# EAGLE board 24V AC SSR Board_bk (EAGLE 7.3.0)
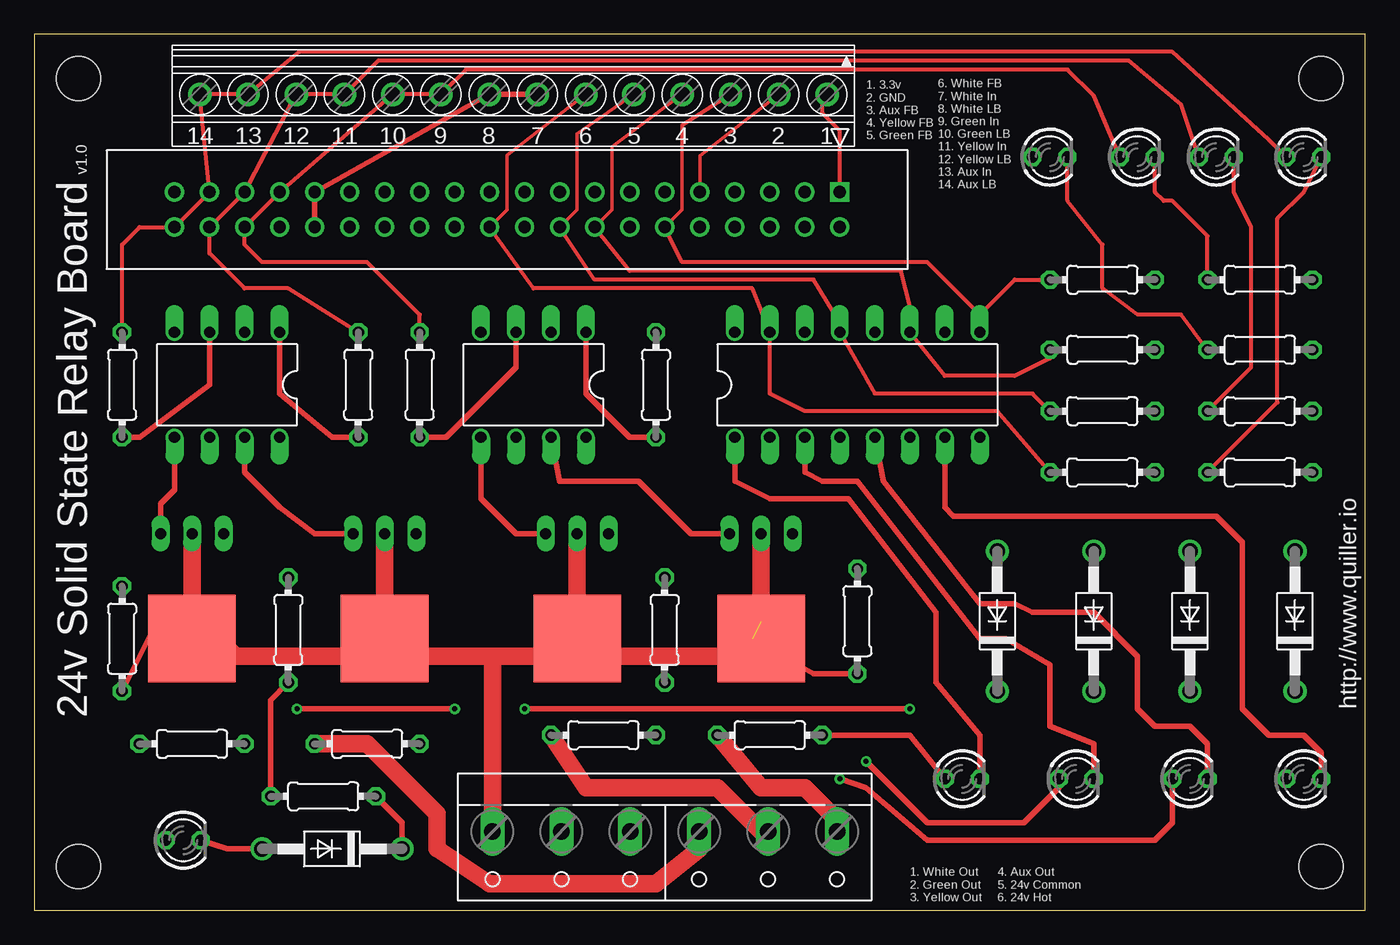
[diagram p0: board, top side]
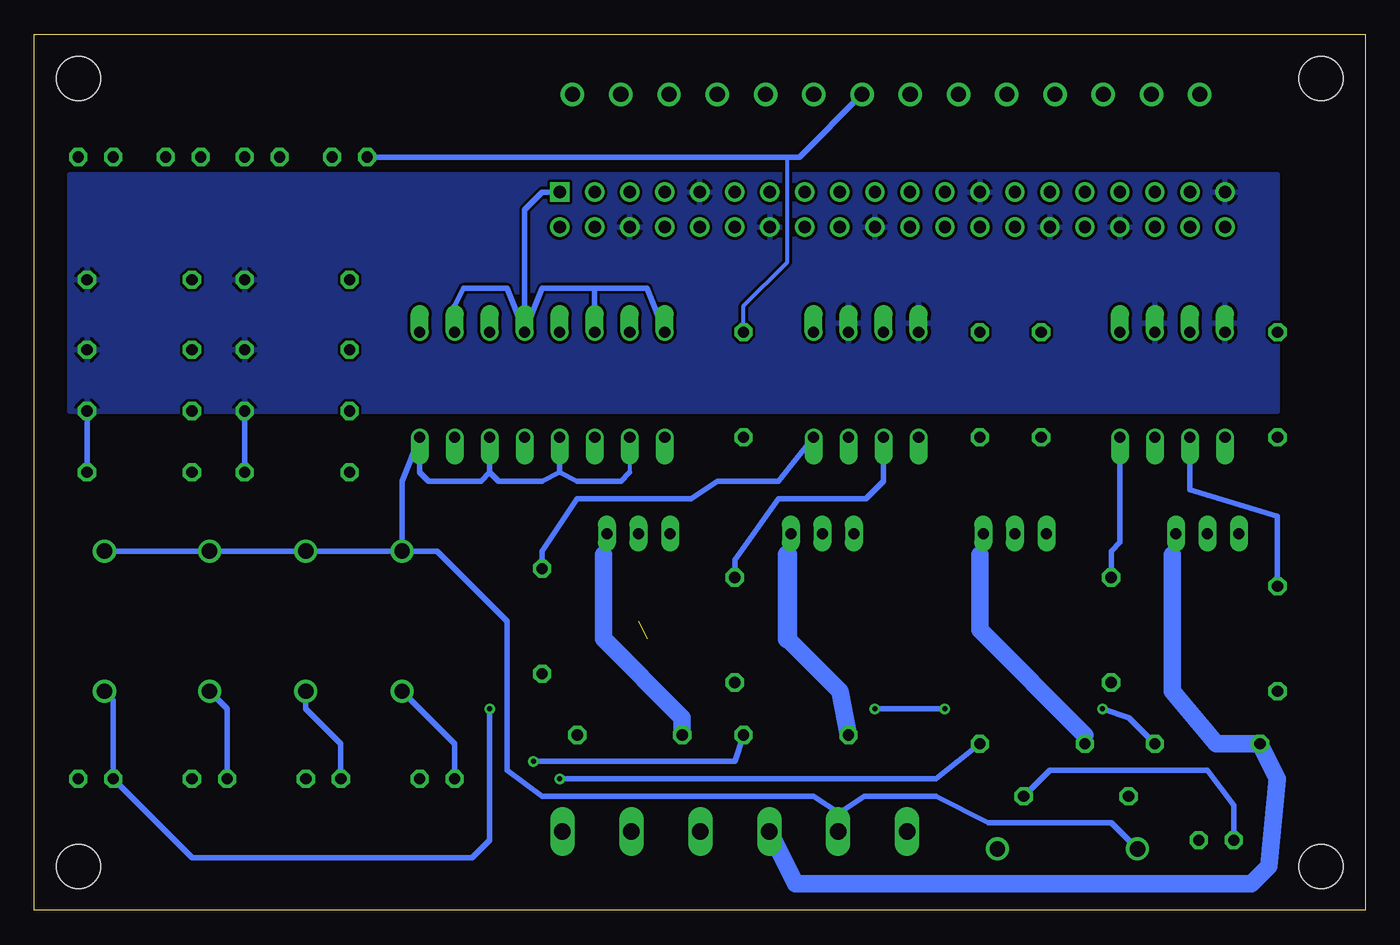
[diagram p1: board, bottom side, seen from below]

Size 96.52 x 63.5 mm. Coordinates in mm from the lower left corner, seen from the top.
Outline: 0,0 96.52,0 96.52,63.5 0,63.5 0,0
Copper layers (1*16): Top 0.035mm / dielectric 1.5mm / Bottom 0.035mm
Design rules "default": minimum track width 10mil, minimum drill 24mil, track to track 8mil, track to pad 8mil, pad to pad 8mil, via to via 8mil, smd to smd 8mil, copper to edge 40mil, drill to drill 8mil, minimum pad ring 10mil, minimum via ring 8mil, stop-mask expansion 4mil, vias tented up to drill 0mil, thermal gap 10mil
Holes 3.2 mm at 3.17,60.33 93.34,60.33 93.34,3.17 3.17,3.17

## Footprints (pad centres in the part's own frame; a part is rotated, then mirrored left to right if it is on the bottom)
DO41-10 = drill 1.118: A 5.08,0; C -5.08,0
3M_2540-6002UB = drill 0.889 square: 1 0,2.54 | drill 0.889: 2 0,0; 3 -2.54,2.54; 4 -2.54,0; 5 -5.08,2.54; 6 -5.08,0; 7 -7.62,2.54; 8 -7.62,0; 9 -10.16,2.54; 10 -10.16,0; 11 -12.7,2.54; 12 -12.7,0; 13 -15.24,2.54; 14 -15.24,0; 15 -17.78,2.54; 16 -17.78,0; 17 -20.32,2.54; 18 -20.32,0; 19 -22.86,2.54; 20 -22.86,0; 21 -25.4,2.54; 22 -25.4,0; 23 -27.94,2.54; 24 -27.94,0; 25 -30.48,2.54; 26 -30.48,0; 27 -33.02,2.54; 28 -33.02,0; 29 -35.56,2.54; 30 -35.56,0; 31 -38.1,2.54; 32 -38.1,0; 33 -40.64,2.54; 34 -40.64,0; 35 -43.18,2.54; 36 -43.18,0; 37 -45.72,2.54; 38 -45.72,0; 39 -48.26,2.54; 40 -48.26,0
LED3MM = drill 0.813 octagon: A -1.27,0; K 1.27,0
DIL16 = drill 0.813 offset: 1 -8.89,-3.81; 2 -6.35,-3.81; 3 -3.81,-3.81; 4 -1.27,-3.81; 5 1.27,-3.81; 6 3.81,-3.81; 7 6.35,-3.81; 8 8.89,-3.81; 9 8.89,3.81; 10 6.35,3.81; 11 3.81,3.81; 12 1.27,3.81; 13 -1.27,3.81; 14 -3.81,3.81; 15 -6.35,3.81; 16 -8.89,3.81
0204/7 = drill 0.813 octagon: 1 -3.81,0; 2 3.81,0
W237-6 = drill 1.194 long: 1 -12.5,-1.27; 2 -7.5,-1.27; 3 -2.5,-1.27; 4 2.5,-1.27; 5 7.5,-1.27; 6 12.5,-1.27
SOT-82 = drill 0.8 long: P$1 -2.29,0; P$2 0,0; P$3 2.29,0 | smd 6.35 x 6.35: P$4 0,7.62
DIL08 = drill 0.813 offset: 1 -3.81,-3.81; 2 -1.27,-3.81; 3 1.27,-3.81; 4 3.81,-3.81; 5 3.81,3.81; 6 1.27,3.81; 7 -1.27,3.81; 8 -3.81,3.81
1751293 = drill 1.1 pad 1.7: 1 -10.5,-0.1; 2 -7,-0.1; 3 -3.5,-0.1; 4 0,-0.1; 5 3.5,-0.1; 6 7,-0.1; 7 10.5,-0.1; 8 14,-0.1; 9 17.5,-0.1; 10 21,-0.1; 11 24.5,-0.1; 12 28,-0.1; 13 31.5,-0.1; 14 35,-0.1

## Placement (x,y rotation side)
D1  1N4004  [DO41-10]  21.59,4.45 180 top
D2  1N4001  [DO41-10]  69.85,20.95 90 top
D3  1N4001  [DO41-10]  76.83,20.95 90 top
D4  1N4001  [DO41-10]  83.82,20.95 90 top
D5  1N4001  [DO41-10]  91.44,20.95 90 top
IN  30340-6002HB  [3M_2540-6002UB]  58.42,49.53 0 top
LED4  Red  [LED3MM]  10.79,5.08 0 top
LED_IN_A  Blue  [LED3MM]  92.08,54.61 0 top
LED_IN_G  Green  [LED3MM]  80.01,54.61 0 top
LED_IN_W  White  [LED3MM]  73.66,54.61 0 top
LED_IN_Y  Yellow  [LED3MM]  85.72,54.61 0 top
LED_OUT_A  Blue  [LED3MM]  92.08,9.53 0 top
LED_OUT_G  Green  [LED3MM]  75.56,9.53 0 top
LED_OUT_W  White  [LED3MM]  67.31,9.53 0 top
LED_OUT_Y  Yellow  [LED3MM]  83.82,9.53 0 top
OPTO-ISO  LTV-845  [DIL16]  59.69,38.1 0 top
R1  100  [0204/7]  59.69,20.95 270 top
R2  330  [0204/7]  45.09,38.1 270 top
R3  100  [0204/7]  45.72,20.32 270 top
R4  330  [0204/7]  27.94,38.1 270 top
R5  100  [0204/7]  18.41,20.32 270 top
R6  330  [0204/7]  23.5,38.1 270 top
R7  100  [0204/7]  88.9,40.64 0 top
R8  100  [0204/7]  88.9,45.72 0 top
R9  100  [0204/7]  88.9,36.2 0 top
R10  2.2K  [0204/7]  20.95,8.26 0 top
R11  2.2K  [0204/7]  53.34,12.7 0 top
R12  2.2K  [0204/7]  41.27,12.7 0 top
R13  2.2K  [0204/7]  24.13,12.06 0 top
R14  330  [0204/7]  6.35,38.1 270 top
R15  100  [0204/7]  88.9,31.75 0 top
R16  100  [0204/7]  6.35,19.68 270 top
R17  2.2K  [0204/7]  11.43,12.06 0 top
R18  4.7K  [0204/7]  77.47,31.75 0 top
R19  4.7K  [0204/7]  77.47,36.2 0 top
R20  4.7K  [0204/7]  77.47,40.64 0 top
R21  4.7K  [0204/7]  77.47,45.72 0 top
TERM  [W237-6]  45.72,4.45 180 top
U$1  BT134  [SOT-82]  52.7,27.3 180 top
U$2  BT134  [SOT-82]  39.37,27.3 180 top
U$3  BT134  [SOT-82]  25.4,27.3 180 top
U$4  BT134  [SOT-82]  11.43,27.3 180 top
U$5  TLP525G−4  [DIL08]  36.2,38.1 180 top
U$6  TLP525G−4  [DIL08]  13.97,38.1 180 top
X1  1751293  [1751293]  46.99,59.05 180 top

## Library data of the parts
D1-D5 = diode
IN = 3M_By_element14_Batch_1; MPN: 2540-6002UB; OC_FARNELL: 1368965; OC_NEWARK: 46F4732; PACKAGE: Four-Wall Header, 40way; SUPPLIER: 3M
LED4 LED_IN_A LED_IN_G LED_IN_W LED_IN_Y LED_OUT_A LED_OUT_G LED_OUT_W LED_OUT_Y = led
OPTO-ISO U$5 U$6 = myhvac
R1-R21 = rcl
TERM = con-wago-500; OC_FARNELL: unknown; OC_NEWARK: unknown
U$1-U$4 = nich
X1 = myhvac; OC_FARNELL: unknown; OC_NEWARK: unknown

## Nets
3.3V_SOURCE: IN.1 OPTO-ISO.10 OPTO-ISO.12 OPTO-ISO.14 OPTO-ISO.16 X1.1
+24V: R1.2 R3.2 R5.2 R10.1 R16.2 TERM.6 U$1.P$2 U$2.P$2 U$3.P$2 U$4.P$2
AUX_FEEDBACK: IN.12 OPTO-ISO.9 R21.1 X1.3
AUX_IN: IN.37 IN.40 LED_IN_A.A R14.1 X1.13 X1.14
AUX_OUT: R17.1 TERM.4 U$4.P$1
GND: IN.6 IN.9 IN.14 IN.20 IN.25 IN.30 IN.34 IN.39 R7.2 R8.2 R9.2 R15.2 R18.2 R19.2 R20.2 R21.2 U$5.2 U$5.4 U$6.2 U$6.4 X1.2
GREEN_FEEDBACK: IN.18 OPTO-ISO.13 R19.1 X1.5
GREEN_IN: IN.33 IN.36 LED_IN_G.A R4.1 X1.9 X1.10
GREEN_OUT: R12.1 TERM.2 U$2.P$1
N$1: U$1.P$3 U$5.7
N$2: R2.2 U$5.1
N$3: U$4.P$3 U$6.5
N$4: R1.1 U$5.8
N$5: U$3.P$3 U$6.7
N$6: R4.2 U$5.3
N$7: U$2.P$3 U$5.5
N$8: R3.1 U$5.6
N$9: LED_OUT_W.K OPTO-ISO.1
N$10: R6.2 U$6.1
N$11: LED_OUT_G.K OPTO-ISO.3
N$12: R5.1 U$6.8
N$13: LED_OUT_Y.K OPTO-ISO.5
N$14: LED_OUT_A.K OPTO-ISO.7
N$17: LED_IN_W.K R7.1
N$18: LED_IN_G.K R8.1
N$20: LED_IN_Y.K R9.1
N$21: D2.C LED_OUT_W.A R11.2
N$22: D3.C LED_OUT_G.A R12.2
N$23: D4.C LED_OUT_Y.A R13.2
N$24: D1.C LED4.A R10.2
N$27: R14.2 U$6.3
N$28: LED_IN_A.K R15.1
N$29: R16.1 U$6.6
N$30: D5.C LED_OUT_A.A R17.2
V-: D1.A D2.A D3.A D4.A D5.A LED4.K OPTO-ISO.2 OPTO-ISO.4 OPTO-ISO.6 OPTO-ISO.8 TERM.5
WHITE_FEEDBACK: IN.22 OPTO-ISO.15 R18.1 X1.6
WHITE_IN: IN.31 IN.32 LED_IN_W.A R2.1 X1.7 X1.8
WHITE_OUT: R11.1 TERM.1 U$1.P$1
YELLOW_FEEDBACK: IN.16 OPTO-ISO.11 R20.1 X1.4
YELLOW_IN: IN.35 IN.38 LED_IN_Y.A R6.1 X1.11 X1.12
YELLOW_OUT: R13.1 TERM.3 U$3.P$1

## Tracks (layer width: path | path; a pad name or v marks a point on that pad's centre or on a via)
3.3V_SOURCE
  Top 0.305: IN.1 58.42,56.52 57.15,57.78 57.15,59.49 X1.1
  Bottom 0.406: OPTO-ISO.16 52.07,45.09 55.88,45.09 | 55.88,45.09 59.69,45.09 OPTO-ISO.12 | OPTO-ISO.14 55.88,45.09 | OPTO-ISO.12 62.23,45.09 65.41,45.09 66.04,43.81 OPTO-ISO.10 | IN.1 59.69,52.07 60.96,50.8 OPTO-ISO.12
+24V  (1 unrouted)
  Top 0.406: R16.2 8.89,20.95 12.38,20.64 | 19.05,18.41 18.41,17.78 R5.2 17.14,15.24 R10.1 | R3.2 45.72,18.41 | R1.2 56.52,17.14 52.07,19.68
  Top 1.27: TERM.6 33.22,18.41 | 33.22,18.41 25.4,18.41 | 25.4,18.41 19.05,18.41 14.61,18.41 12.38,20.64 11.43,21.59 U$4.P$2 | U$3.P$2 25.4,18.41 | U$1.P$2 52.7,20.95 50.16,18.41 45.72,18.41 39.37,18.41 | 39.37,18.41 33.22,18.41 | U$2.P$2 39.37,18.41
AUX_FEEDBACK
  Top 0.254: IN.12 46.99,50.8 46.99,56.92 X1.3
  Top 0.305: OPTO-ISO.9 68.58,43.18 | 68.58,43.18 71.12,45.72 R21.1 | 68.58,43.18 64.77,46.99 46.99,46.99 IN.12
AUX_IN
  Top 0.305: R14.1 6.35,48.26 7.62,49.53 IN.40 IN.37 X1.14 X1.13 19.2,62.23 82.55,62.23 89.53,55.88 LED_IN_A.A
AUX_OUT
  Bottom 0.406: 13.97,25.79 U$4.P$1
  Bottom 1.27: 13.97,25.79 13.97,15.88 10.79,12.06 R17.1 6.35,9.53 6.99,3.17 8.26,1.91 41.31,1.91 TERM.4
GND
  Top 0.254: IN.9 48.26,54.7 X1.2
  Bottom 0.406: R18.2 R19.2 | R15.2 R9.2
  pour Bottom: 6.35,53.34 6.35,36.2 93.98,36.2 93.98,53.34
GREEN_FEEDBACK
  Top 0.254: IN.18 39.37,50.8 39.37,56.3 X1.5
  Top 0.305: R19.1 72.39,37.47 60.96,37.47 OPTO-ISO.13 58.42,42.55 56.52,45.72 40.64,45.72 IN.18
GREEN_IN
  Top 0.305: R4.1 27.94,43.18 24.13,46.99 16.51,46.99 15.24,48.26 IN.36 IN.33 X1.10 X1.9 31.3,60.96 74.93,60.96 76.83,59.05 LED_IN_G.A
GREEN_OUT
  Top 0.406: TERM.2 53.22,5.2
  Top 1.27: 53.22,5.2 49.53,8.89 40.01,8.89 R12.1
  Bottom 0.406: 41.91,25.79 U$2.P$1
  Bottom 1.27: R12.1 38.1,15.88 41.91,19.68
  Bottom 1.422: 41.91,19.68 41.91,25.79
N$1
  Top 0.406: U$1.P$3 47.62,27.3 43.81,31.11 38.1,31.11 U$5.7
N$2
  Top 0.406: R2.2 43.18,34.29 40.01,37.47 U$5.1
N$3
  Top 0.406: U$4.P$3 9.14,29.46 10.16,30.48 U$6.5
N$4
  Bottom 0.406: R1.1 59.69,26.04 57.15,29.84 48.9,29.84 46.99,31.11 42.55,31.11 U$5.8
N$5
  Top 0.406: U$3.P$3 20.32,27.3 17.78,29.21 15.24,31.75 U$6.7
N$6
  Top 0.406: R4.2 29.84,34.29 34.92,39.37 U$5.3
N$7
  Top 0.406: U$2.P$3 34.92,27.3 32.38,29.84 U$5.5
N$8
  Bottom 0.406: R3.1 45.72,25.4 42.55,29.84 36.2,29.84 34.92,31.11 U$5.6
N$9
  Top 0.406: LED_OUT_W.K 68.58,12.7 65.41,16.51 65.41,21.59 59.05,29.84 53.34,29.84 50.8,31.11 OPTO-ISO.1
N$10
  Top 0.406: R6.2 21.59,34.29 17.78,37.47 U$6.1
N$11
  Top 0.406: OPTO-ISO.3 55.88,31.75 57.15,31.11 59.69,31.11 68.58,19.68 70.48,19.68 73.66,17.78 73.66,13.34 76.83,12.06 LED_OUT_G.K
N$12
  Bottom 0.406: R5.1 18.41,26.04 17.78,26.67 U$6.8
N$13
  Top 0.406: OPTO-ISO.5 61.59,31.11 68.58,22.23 71.12,22.23 72.39,21.59 76.83,21.59 80.01,18.41 80.01,14.61 81.28,13.34 83.82,13.34 85.09,12.06 LED_OUT_Y.K
N$14
  Top 0.406: OPTO-ISO.7 66.04,29.21 66.67,28.57 85.72,28.57 87.63,26.67 87.63,14.61 89.53,12.7 92.08,12.7 93.34,11.43 LED_OUT_A.K
N$17
  Top 0.305: R7.1 83.19,43.18 80.01,43.18 77.47,45.09 77.47,48.26 74.93,51.44 LED_IN_W.K
N$18
  Top 0.305: R8.1 85.09,48.9 82.55,51.44 81.92,51.44 81.28,52.07 LED_IN_G.K
N$20
  Top 0.305: R9.1 88.27,39.37 88.27,49.53 87,52.07 LED_IN_Y.K
N$21
  Top 0.406: R11.2 63.5,12.7 LED_OUT_W.A
  Bottom 0.406: LED_OUT_W.A 66.04,12.06 D2.C
N$22  (via drill 0.36)
  Top 0.406: v60.33,10.79 64.77,6.35 71.75,6.35 74.3,8.89 LED_OUT_G.A
  Bottom 0.406: LED_OUT_G.A 74.3,12.06 76.83,14.61 D3.C | R12.2 45.72,10.79 v60.33,10.79
N$23  (via drill 0.36)
  Top 0.406: v58.42,9.53 60.33,8.89 64.77,5.08 81.28,5.08 82.55,6.35 LED_OUT_Y.A
  Bottom 0.406: D4.C 82.55,14.61 LED_OUT_Y.A | R13.2 31.11,9.53 v58.42,9.53
N$24
  Top 0.406: D1.C 26.67,6.35 R10.2
  Bottom 0.406: LED4.A 9.53,7.62 11.43,10.16 22.86,10.16 R10.2
N$27
  Top 0.406: R14.2 7.62,34.29 12.7,38.1 U$6.3
N$28
  Top 0.305: R15.1 90.17,36.83 90.17,50.16 92.08,52.07 LED_IN_A.K
N$29
  Bottom 0.406: R16.1 6.35,28.57 12.7,30.48 U$6.6
N$30  (via drill 0.36)
  Top 0.406: v19.05,14.61 v30.48,14.61 | v35.56,14.61 v63.5,14.61
  Bottom 0.406: D5.C 90.81,15.24 LED_OUT_A.A 85.09,3.81 64.77,3.81 63.5,5.08 v63.5,14.61 | R17.2 17.14,13.97 v19.05,14.61 | v30.48,14.61 v35.56,14.61
V-
  Top 0.406: D1.A 13.97,4.45 LED4.K
  Bottom 0.305: OPTO-ISO.2 53.34,31.75
  Bottom 0.406: D2.A D3.A D4.A D5.A | D2.A 69.85,31.11 OPTO-ISO.8 68.58,31.75 67.94,31.11 64.14,31.11 63.5,31.75 | 63.5,31.75 OPTO-ISO.6 | OPTO-ISO.4 58.42,31.75 | 58.42,31.75 59.69,31.11 62.87,31.11 63.5,31.75 | 53.34,31.75 53.98,31.11 57.15,31.11 58.42,31.75 | TERM.5 38.22,6.99 | 38.22,6.99 38.22,7.11 40.01,8.26 59.69,8.26 62.23,10.16 62.23,20.95 67.31,26.04 D2.A | D1.A 18.41,6.35 27.3,6.35 31.11,8.26 36.31,8.26 38.22,6.99
WHITE_FEEDBACK
  Top 0.254: IN.22 34.29,50.8 34.29,54.73 X1.6
  Top 0.305: R18.1 69.85,36.2 55.88,36.2 53.34,37.47 OPTO-ISO.15 52.07,45.09 36.2,45.09 IN.22
WHITE_IN
  Top 0.406: IN.32 IN.31 X1.8 X1.7
  Bottom 0.305: R2.1 45.09,43.81 41.91,46.99 41.91,54.61
  Bottom 0.406: LED_IN_W.A 41.91,54.61 41.03,54.61 X1.7
WHITE_OUT
  Top 0.406: TERM.1 58.22,6.55
  Top 1.27: 58.22,6.55 55.88,8.89 52.7,8.89 R11.1
  Bottom 0.406: 55.24,25.79 U$1.P$1
  Bottom 1.27: R11.1 49.53,13.97 55.24,19.68 55.24,25.79
YELLOW_FEEDBACK
  Top 0.254: IN.16 41.91,50.8 41.91,55.34 X1.4
  Top 0.305: R20.1 73.66,40.01 71.12,38.73 66.04,38.73 OPTO-ISO.11 63.5,43.81 62.87,46.35 43.18,46.35 IN.16
YELLOW_IN
  Top 0.305: R6.1 18.41,45.09 15.24,45.09 12.7,47.62 IN.38 IN.35 X1.12 X1.11 24.93,61.59 79.38,61.59 83.19,58.42 LED_IN_Y.A
YELLOW_OUT
  Top 0.406: TERM.3 48.22,4.41
  Top 1.27: 48.22,4.41 45.09,1.91 33.02,1.91 29.21,4.45 29.21,6.99 24.13,12.06 R13.1
  Bottom 0.406: R13.1 20.32,12.7 | 27.94,25.79 U$3.P$1
  Bottom 1.27: 20.32,12.7 27.94,20.32 27.94,25.79

## Text on the board
tNames: 1. 3.3v / 2. GND / 3. Aux FB / 4. Yellow FB / 5. Green FB | v1.0 | 6. White FB / 7. White In / 8. White LB / 9. Green In / 10. Green LB / 11. Yellow In / 12. Yellow LB / 13. Aux In / 14. Aux LB | http://www.quiller.io | 24v Solid State Relay Board | 1. White Out / 2. Green Out / 3. Yellow Out | 4. Aux Out / 5. 24v Common / 6. 24v Hot